# Altium PCB PS.PcbDoc
Units mm, origin at the board's own origin, x right, y up, seen from the top; angles counter-clockwise.
Board outline 55 x 64 mm, 2 copper layers (Top Layer, Bottom Layer), stack 1.571 mm thick; 25 components, 11 nets, 83 pads, 162 vias.
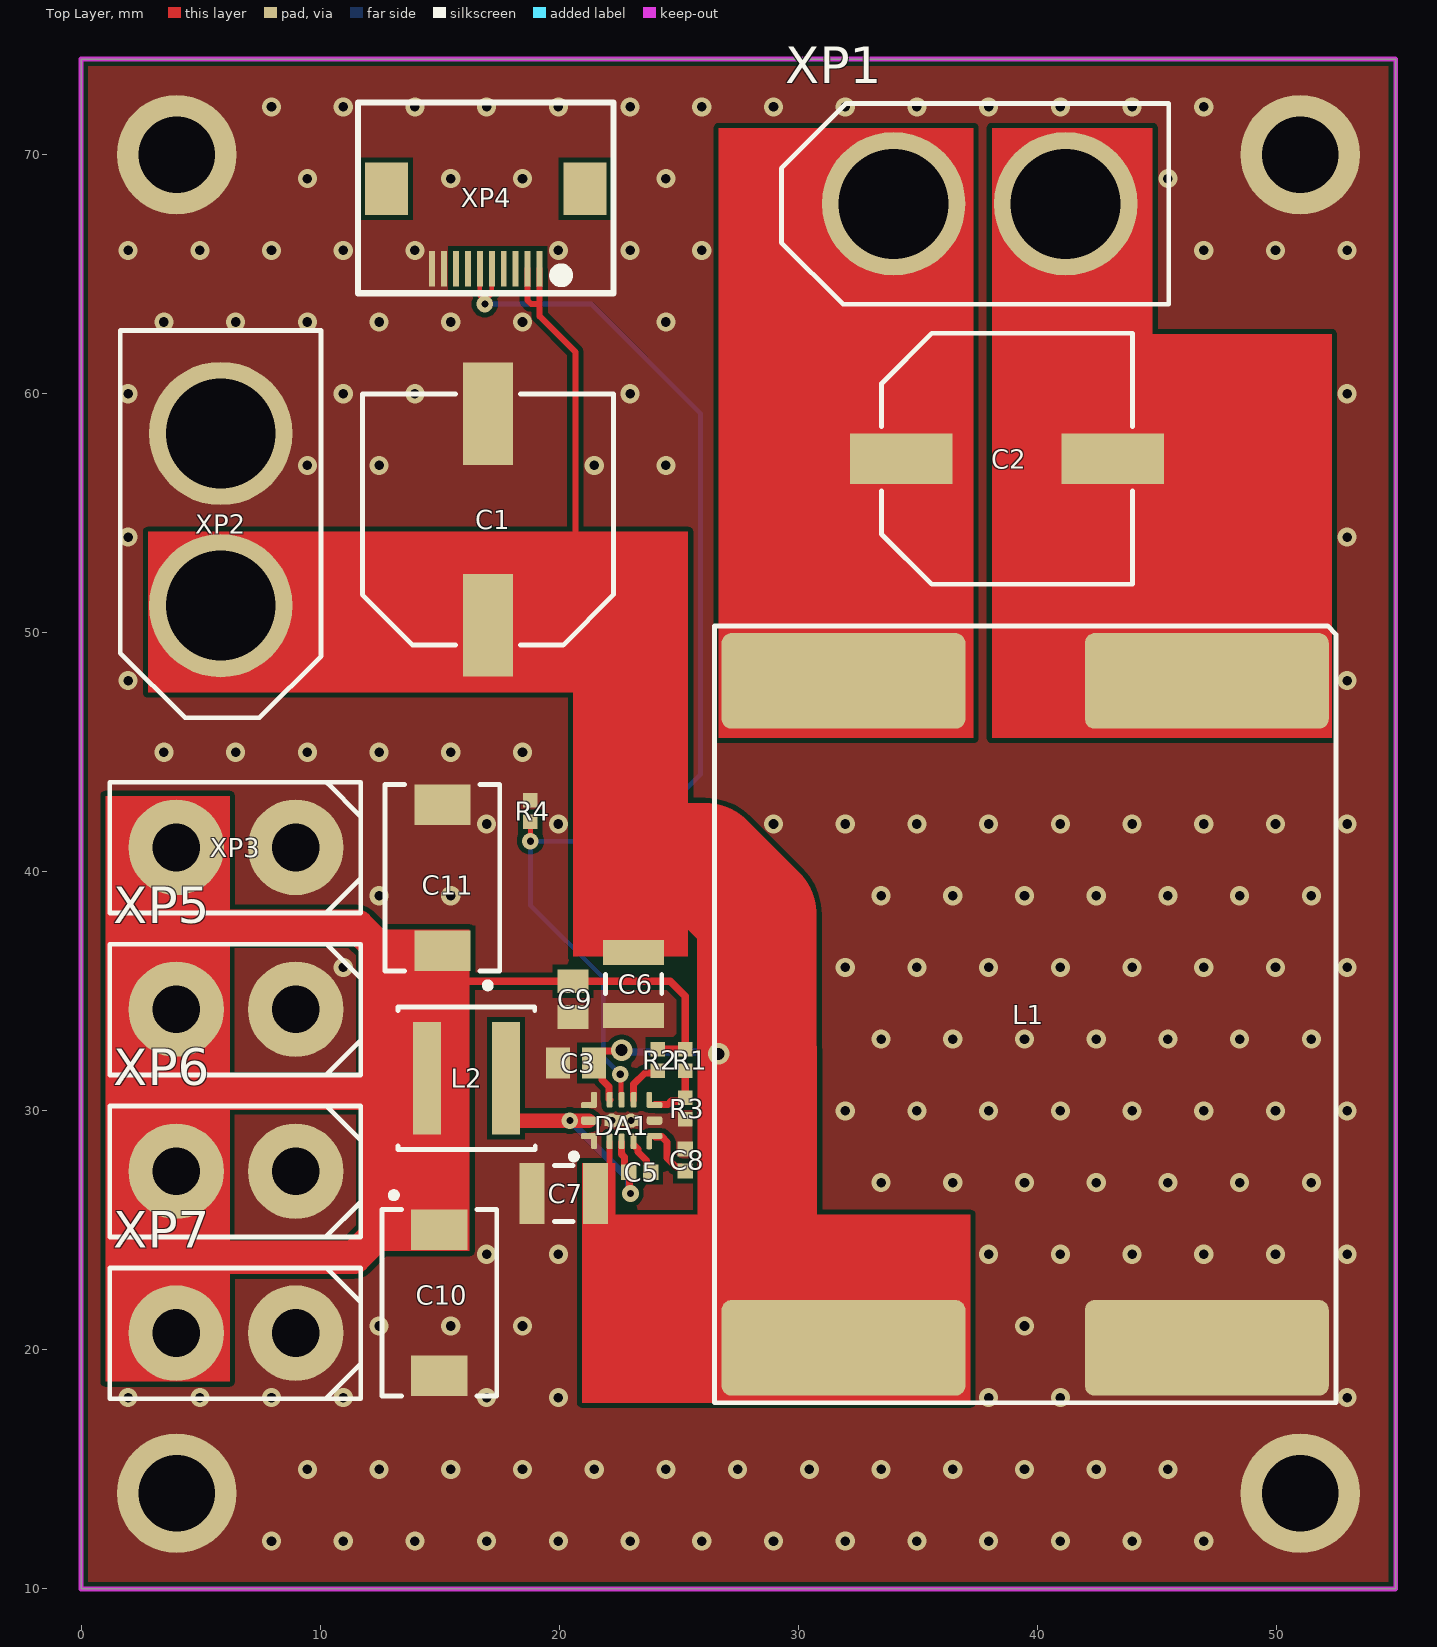
[diagram p0: Top Layer view]
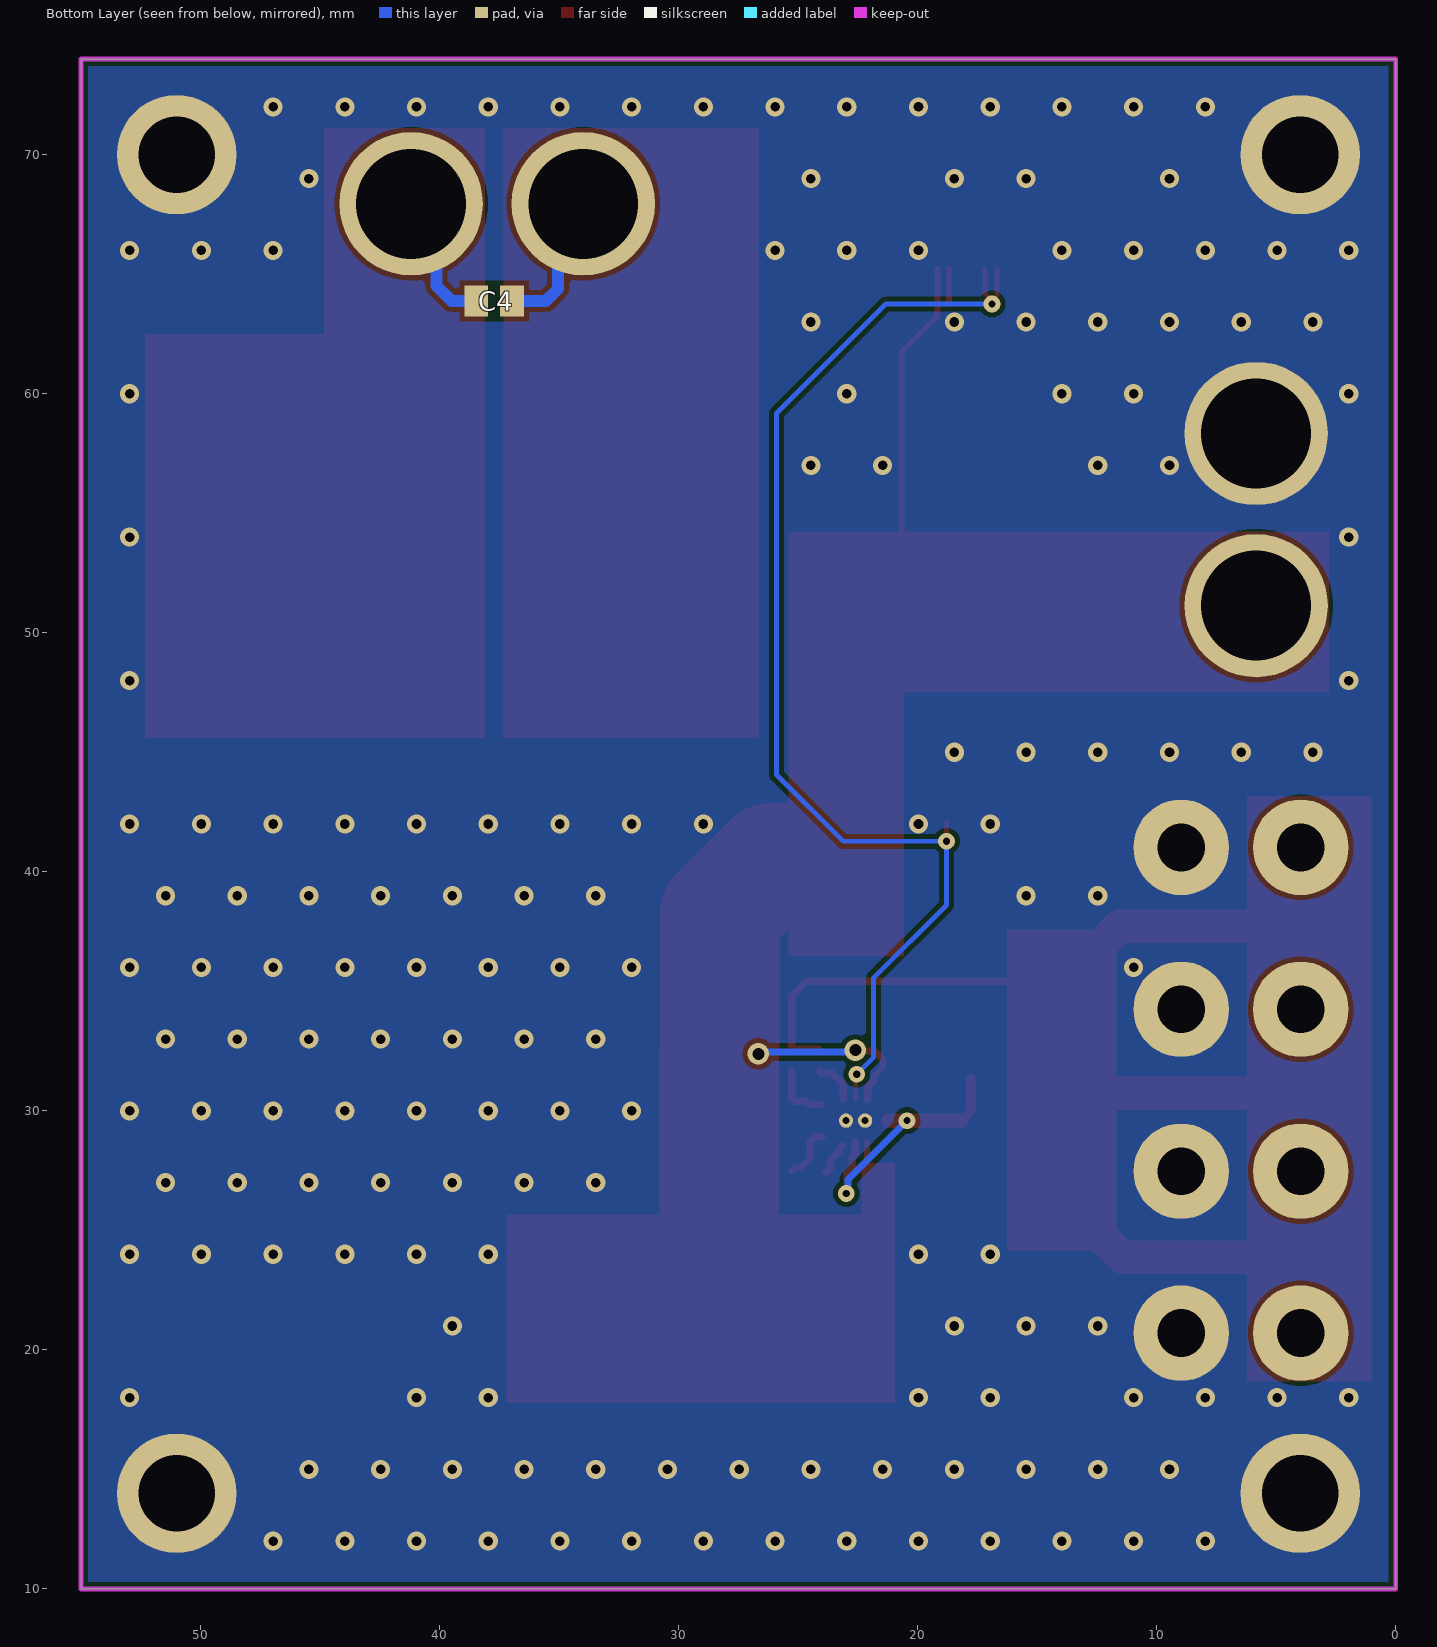
[diagram p1: Bottom Layer view, seen from below]
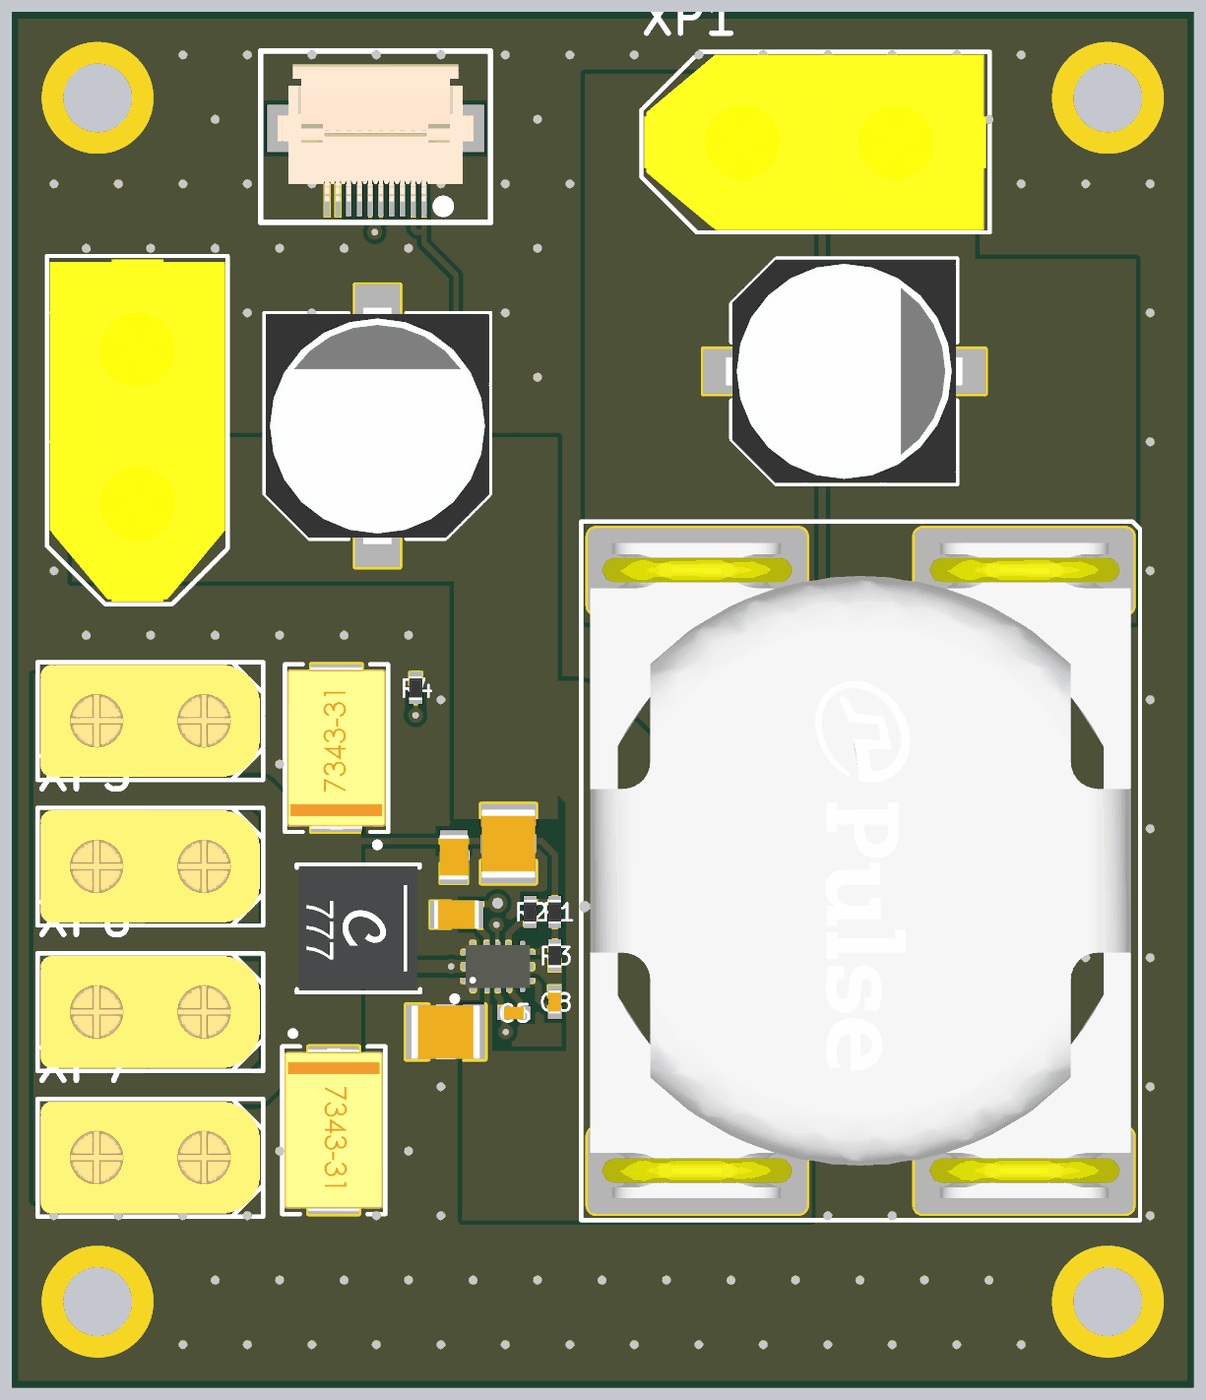
[diagram p2: 3D render of the assembled board from above, using the file's embedded part models]

## Layer stack, top to bottom
Top Solder: solder mask 0.0102, Solder Resist, Dk 3.5
Top Layer: signal copper 0.0356
Dielectric 1: dielectric 1.5, FR-4, Dk 4.8
Bottom Layer: signal copper 0.0356
Bottom Solder: solder mask 0.0102, Solder Resist, Dk 3.5

## Board outline
0,10 0,74 55,74 55,10

## Design rules (kind name [scope] priority, off if disabled: settings)
Clearance Clearance_1 [InNetClass('RF CLR')] p1: gap=0.254 ignorepadtopadclearanceinfootprint=FALSE except(1: Arc-Fill Arc-Poly Arc-Region Track-Fill Track-Poly Track-Region SMDPad-Fill SMDPad-Poly SMDPad-Region THPad-Fill THPad-Poly THPad-Region Via-Fill Via-Poly Via-Region Fill-Fill Fill-Poly Fill-Region Poly-Poly Poly-Region Region-Region)
Clearance [All] p2: gap=0.2 ignorepadtopadclearanceinfootprint=FALSE
HoleSize [All] p1: absolutevalues=TRUE maxlimit=5 minlimit=0.2 maxpercent=80.000 minpercent=20.000
PlaneConnect [All] p1: planeconnectstyle=Direct reliefexpansion=0.508 reliefentries=4 reliefconductorwidth=0.254 reliefairgap=0.254
PolygonConnect [All] p1: connectstyle=Direct reliefconductorwidth=0.254 reliefentries=4 polygonreliefangle="90 Angle" airgapwidth=0.254
RoutingVias [All] p1: holewidth=0.4 width=0.8 viastyle="Through Hole" minholewidth=0.3 minwidth=0.7 maxholewidth=4 maxwidth=5
SolderMaskExpansion [All] p1: expansion=0.102 istentingtop=FALSE
SupplyNets "Schematic Supply Nets_35" [InNet('PWR_ON')] p1: voltage=0.000
SupplyNets "Schematic Supply Nets_15" [InNet('VDD_28V')] p2: voltage=0.000
SupplyNets "Schematic Supply Nets_14" [InNet('GND')] p3: voltage=0.000
Width [All] p1: maxlimit=5 minlimit=0.2 preferedwidth=0.25
28 further rules are at their usual default settings.

## Components (designator, comment, footprint, x,y, rotation, side; value= is the part's Value field where it differs from the comment)
C1 "47мк" CAPAE116103X105N 17.018,54.737 r90 top
C2 "47мк" CAPAE116103X105N 38.735,57.277 r0 top
C3 "1000" CAPC2012X12L 20.701,32.004 r0 top
C4 "1000" CAPC2012X12L 37.719,63.881 r180 bottom
C5 "0.1мк" CAPC1005X06N 23.368,27.432 r0 top
C6 "10мк" CAPC3225X27L 23.114,35.306 r90 top
C7 "10мк" CAPC3225X27L 20.193,26.543 r0 top
C8 "1мк" CAPC1005X06N 25.273,27.94 r270 top
C9 "22мк" CAPC2012X12L 20.574,34.671 r90 top
C10 "47мк" CAPMP7343X28L 14.986,21.971 r90 top
C11 "47мк" CAPMP7343X28L 15.113,39.751 r270 top
DA1 "LM60440DRPKR" WQFN-13 22.614,29.591 r90 top
L1 "PA4339.701NLT" HCCI-80-2 39.497,34.036 r270 top
L2 "5.6мкГн" Coilcraft-XAL5030 16.125,31.369 r180 top
R1 "100к" RESC1005X06N 25.273,32.131 r270 top
R2 "100к" RESC1005X06N 24.13,32.131 r270 top
R3 "9.1к" RESC1005X06N 25.273,30.099 r270 top
R4 "100к" RESC1005X06N 18.796,42.545 r90 top
XP1 "XT60-F" XT60-F 37.592,67.945 r0 top
XP2 "XT60-F" XT60-F 5.842,54.737 r90 top
XP3 "XT30UPB-M" XT30UPB-M 6.477,41.021 r180 top
XP4 "FH12-10S-0.5SVA" FH12-10S-0.5SH 16.932,65.23 r180 top
XP5 "XT30UPB-M" XT30UPB-M 6.477,34.248 r180 top
XP6 "XT30UPB-M" XT30UPB-M 6.477,27.474 r180 top
XP7 "XT30UPB-M" XT30UPB-M 6.477,20.701 r180 top

## Footprints (in the part's own frame and the unit in brackets; to place one, negate y for a bottom-side part, rotate by r counter-clockwise, add the part's x,y. Pads: shape width x height; smd on the part's side, far side on the other; paste and mask are expansions set on the pad)
CAPAE116103X105N [mm] "Aluminum Electrolytic Capacitor, Body 10,30x10,30x10,50mm, IPC Medium Density"
  rect 4.3x2.1 smd: 1(-4.425,0) 2(4.425,0)
  silkscreen extent -5.25,-5.25 5.25,5.25, body extent -5.5,-5.2 5.5,5.2, height 10.41
CAPC1005X06N [mm] "Chip Capacitor, 2-Leads, Body 1,00x0,50mm, IPC Medium Density"
  rect 0.64x0.64 smd mask+0.05: 1(-0.46,0) 2(0.46,0)
  body extent -0.55,-0.3 0.55,0.3, height 0.6
CAPC2012X12L [mm] "Chip Capacitor, 2-Leads, Body 2,00x1,25mm, IPC High Density"
  rect 1x1.3 smd mask+0.05: 1(-0.75,0) 2(0.75,0)
  body extent -1.05,-0.67 1.05,0.67, height 1.25
CAPC3225X27L [mm] "Chip Capacitor, 2-Leads, Body 3,20x2,50mm, IPC High Density"
  rect 1.05x2.55 smd: 1(-1.325,0) 2(1.325,0)
  silkscreen extent -0.4,-1.17 0.4,1.18, body extent -1.6,-1.25 1.6,1.25, height 2.7
CAPMP7343X28L [mm] "Molded Capacitor, 2-Leads, Body 7.30x4.30mm, IPC High Density"
  rect 1.7x2.35 smd: 1(3.05,0) 2(-3.05,0)
  silkscreen extent -3.9,-2.4 4.62,2.4, body extent -3.8,-2.3 3.8,2.3, height 3.1
Coilcraft-XAL5030 [mm]
  rect 1.18x4.7 smd: 1(-1.655,0) 2(1.655,0)
  silkscreen extent -2.88,-2.97 2.86,2.99, body extent -2.74,-2.84 2.74,2.84, height 3.1
FH12-10S-0.5SH [mm] "FFC/FPC Connector 10 Circuits"
  rect 1.8x2.2 smd mask+0.051: 0(-4.15,-3.35) 0(4.15,-3.35)
  rect 0.25x1.5 smd mask+0.051: 1(-2.25,0) 2(-1.75,0) 3(-1.25,0) 4(-0.75,0) 5(-0.25,0) 6(0.25,0) 7(0.75,0) 8(1.25,0) 9(1.75,0) 10(2.25,0)
  silkscreen extent -5.35,-6.95 5.35,1.02, body extent -4.55,-6.35 4.55,0.05, height 2.14
HCCI-80-2 [mm] "SMT Common Mode Chokes 25.4x31 mm"
  rrect20% 4x10.2 smd: 1(-13.95,-7.6) 2(-13.95,7.6) 3(13.95,7.6) 4(13.95,-7.6)
  silkscreen extent -16.25,-13 16.25,13, body extent -15.25,-12.58 15.23,12.57, height 11.98
RESC1005X06N [mm] "Chip Resistor, 2-Leads, Body 1,00x0,50mm, IPC Medium Density"
  rect 0.6x0.6 smd mask+0.05: 1(-0.45,0) 2(0.45,0)
  body extent -0.55,-0.3 0.55,0.3, height 0.6
WQFN-13 [mm] "3.00 mm × 2.00 mm"
  rrect50% 0.65x0.25 smd mask+0.05: 1(-0.87,1.15) 2(-0.87,0.5) 3(-0.87,0) 4(-0.87,-0.5) 5(-0.875,-1.155) 7(0.87,-1.155) 8(0.87,-0.5) 9(0.87,0) 10(0.87,0.5) 11(0.875,1.155)
  rrect50% 0.25x0.65 smd mask+0.05: 1(-0.65,1.375) 5(-0.65,-1.375) 7(0.65,-1.38) 11(0.65,1.375)
  rrect50% 0.35x0.65 smd mask+0.05: 6(0,-1.375) 12(0,1.375)
  round 0.6 hole 0.3 mask+0.05: 13(0,0.414) 13(0,-0.386)
  rect 0.45x1.45 smd mask+0.05: 13(0,0)
  silkscreen extent -1.62,1.87 -1.38,2.12, body extent -1,-1.5 1,1.5, height 0.7
XT30UPB-M [mm]
  round 4 hole 2: 1(-2.5,0) 2(2.5,0)
  silkscreen extent -5.23,-2.73 5.28,2.75, body extent -5.07,-2.6 5.13,2.6, height 9.4
XT60-F [mm]
  round 6 hole 4.6: 1(-3.6,0) 2(3.6,0)
  silkscreen extent -8.29,-4.2 7.91,4.2, body extent -8.16,-4.09 7.74,4.06, height 17.1

## Part data
C1 C2: library part "Конденсатор гибридный SMD 47мкФ ±20% 80В", "Гибридный ЧИП-конденсатор", Manufacturer=Panasonic, ManufacturerPartNumber=EEHZC1K470V, Power/Voltage=80В, Tolerance=±20%, LatestRevisionDate=29-May-2009, LatestRevisionNote="IPC-7351 Footprint Added.", PackageDescription="ZC Series - Anti-Vibration", PackageReference="ZC Series", Published=8-Jun-2000, Publisher="Altium Limited"
C3 C4: library part "Кер.ЧИП конд. 0805 1000пФ X7R 10% 100В", "Кер. ЧИП-конденсатор", Manufacturer=WALSIN, ManufacturerPartNumber=0805B102K100, Power/Voltage=100В, Tolerance=±10%, TKE=X7R
C5: library part "Кер.ЧИП конд. 0402 0.1мкФ X7R 10%, 16В", "Кер. ЧИП-конденсатор", Power/Voltage=16В, Tolerance=±10%, PackageReference=0402, TKE=X7R
C6 C7: library part "Кер.ЧИП конд. 1210 10мкФ X5R 20% 50В", "Кер. ЧИП-конденсатор", Manufacturer=Murata, ManufacturerPartNumber=GRM32ER71H106, Power/Voltage=50В, Tolerance=±20%, TKE=X5R
C8: library part "Кер.ЧИП конд. 0402 1мкФ X5R 10%, 10В", "Кер. ЧИП-конденсатор", Power/Voltage=10В, Tolerance=±10%, PackageReference=0402, TKE=X5R
C9: library part "Кер.ЧИП конд. 0805 22мкФ X5R 10% 16В", "Кер. ЧИП-конденсатор", Manufacturer=TDK, ManufacturerPartNumber=C2012X5R1C226KT, Power/Voltage=16В, Tolerance=±10%, TKE=X5R
C10 C11: library part "Конденсатор танталовый SMD D case 47мкФ ±10% 25B", "Тант. ЧИП-конденсатор", Power/Voltage=25В, Tolerance=±10%, LatestRevisionDate=29-May-2009, LatestRevisionNote="IPC-7351 Footprint Added.", PackageDescription="Chip Capacitor", PackageReference="тип D", Published=8-Jun-2000, Publisher="Altium Limited"
DA1: library part "Микросхема LM60440DRPKR", "3.8-V to 36-V, 4-A Ultra-Small Synchronous Step-Down Converter", ComponentLink1Description=datasheet, ComponentLink1URL=https://www.ti.com/lit/ds/symlink/lm60440.pdf?HQS=dis-dk-null-digikeymode-dsf-pf-null-wwe&ts=1663282176250&ref_url=https%253A%252F%252Fwww.digikey.si%252F
L1: library part "ЧИП синфазный фильтр PG1265NL", "SMT Common Mode Choke", Manufacturer=Pulse, ComponentLink1Description=datasheet, ComponentLink1URL=https://products.pulseelex.com/files/product_files/P850.pdf, ManufacturerPartNumber=PA4339.701NLT
L2: library part "ЧИП индуктивность XAL5030-562MEB", "Shielded Power Inductor – XAL5030", Manufacturer=Сoilcraft, ManufacturerPartNumber=XAL5030-222MEB
R1 R2 R4: library part "Чип резистор 0402 100 кОм, 5%", "ЧИП-резистор", Tolerance=±5%, PackageReference=0402, TKE="100 ppm/°С"
R3: library part "Чип резистор 0402 9,1 кОм, 5%", "ЧИП-резистор", Tolerance=±5%, PackageReference=0402, TKE="100 ppm/°С"
XP1 XP2: library part "Соединитель XT60-F", "AMASS XT60-F"
XP3 XP5 XP6 XP7: library part "Соединитель XT30UPB-M", "AMASS XT30UPB-M  5 mm"
XP4: library part "Соединитель FH12-10S-0.5SVA", "0.5mm  Pitch FPC/FFC Connector FH12 Series", Manufacturer=Hirose

## Free pads (board coordinates)
  round 5 hole 3.2: 1(4,14) 1(4,70) 1(51,14) 1(51,70)

## Via types
v1: diameter 0.8, hole 0.4, Top Layer to Bottom Layer, tented both sides, 155 vias
v2: diameter 0.7, hole 0.3, Top Layer to Bottom Layer, tented both sides, 5 vias
v3: diameter 0.9, hole 0.5, Top Layer to Bottom Layer, tented both sides, 2 vias

## Nets (pads, with @x,y where several pads share a name; then routed paths per layer and width w, separated by ;. In a path a pad name is that pad's centre, name@x,y a point inside that pad or via, vN(x,y) a via of type N, cw(c..) or ccw(c..) an arc to the next point about the centre after c; other vN are vias at no path point)
GND: C1.2 C3.1 C6.1 C7.1 C8.1 C9.1 C10.2 C11.2 DA1.1 DA1.6 DA1.11 DA1.13 L1.3 pad.1 R3.2 R4.2 XP2.2 XP3.1 XP4.9 XP4.10 XP5.1 XP6.1 XP7.1
  other v1: 7.967,12 10.967,12 13.967,12 16.967,12 19.967,12 22.967,12 25.967,12 28.967,12 31.967,12 34.967,12 37.967,12 40.967,12 43.967,12 46.967,12 9.467,15 12.467,15 15.467,15 18.467,15 21.467,15 24.467,15 27.467,15 30.467,15 33.467,15 36.467,15 39.467,15 42.467,15 45.467,15 1.967,18 4.967,18 7.967,18 10.967,18 16.967,18 19.967,18 37.967,18 40.967,18 52.967,18 12.467,21 15.467,21 18.467,21 39.467,21 16.967,24 19.967,24 37.967,24 40.967,24 43.967,24 46.967,24 49.967,24 52.967,24 33.467,27 36.467,27 39.467,27 42.467,27 45.467,27 48.467,27 51.467,27 31.967,30 34.967,30 37.967,30 40.967,30 43.967,30 46.967,30 49.967,30 52.967,30 33.467,33 36.467,33 39.467,33 42.467,33 45.467,33 48.467,33 51.467,33 10.967,36 31.967,36 34.967,36 37.967,36 40.967,36 43.967,36 46.967,36 49.967,36 52.967,36 12.467,39 15.467,39 33.467,39 36.467,39 39.467,39 42.467,39 45.467,39 48.467,39 51.467,39 16.967,42 19.967,42 28.967,42 31.967,42 34.967,42 37.967,42 40.967,42 43.967,42 46.967,42 49.967,42 52.967,42 3.467,45 6.467,45 9.467,45 12.467,45 15.467,45 18.467,45 1.967,48 52.967,48 1.967,54 52.967,54 9.467,57 12.467,57 21.467,57 24.467,57 1.967,60 10.967,60 13.967,60 22.967,60 52.967,60 3.467,63 6.467,63 9.467,63 12.467,63 15.467,63 18.467,63 24.467,63 1.967,66 4.967,66 7.967,66 10.967,66 13.967,66 19.967,66 22.967,66 25.967,66 46.967,66 49.967,66 52.967,66 9.467,69 15.467,69 18.467,69 24.467,69 45.467,69 7.967,72 10.967,72 13.967,72 16.967,72 19.967,72 22.967,72 25.967,72 28.967,72 31.967,72 34.967,72 37.967,72 40.967,72 43.967,72 46.967,72
NetC2_1: C2.1 C4.2 L1.1 XP1.1 | length 6.1
  Bottom Layer w0.5: XP1.1 35.044,66.893 35.044,64.397 35.56,63.881 C4.2
NetC2_2: C2.2 C4.1 L1.2 XP1.2 | length 5.8
  Bottom Layer w0.5: C4.1 39.497,63.881 40.14,64.524 40.14,66.893 XP1.2
NetC5_1: C5.1 DA1.3 DA1.12 L2.1 | length 11.5
  Top Layer w0.2: DA1.3@22.606,28.729 DA1.3
  Top Layer w0.3: DA1.3 22.614,28.186 22.738,28.062 22.738,27.602 C5.1 22.948,27.393 22.948,26.582 v2(22.987,26.543)
  Top Layer w0.4: L2.1 17.78,29.981 L2.1@18.17,29.591
  Top Layer w0.6: L2.1@18.17,29.591 v2(20.447,29.591) DA1.12
  Bottom Layer w0.3: v2(20.447,29.591) 22.91,27.128 22.91,26.62 v2(22.987,26.543)
NetC5_2: C5.2 DA1.4 | length 1.4
  Top Layer w0.3: DA1.4@23.139,28.546 23.294,28.391 23.294,28.283 23.658,27.919 23.658,27.602 C5.2
NetC8_2: C8.2 DA1.5 | length 2.2
  Top Layer w0.3: DA1.5@24.014,28.916 24.297,28.916 24.511,28.702 24.511,28.027 24.888,27.65 25.103,27.65 C8.2
NetC9_2: C9.2 C10.1 C11.1 L2.2 R1.1 R2.1 XP3.2 XP5.2 XP6.2 XP7.2 | length 47.6
  Top Layer w0.3: 14.998,35.421 C9.2 24.65,35.421 25.273,34.798 R1.1 R2.1
  Top Layer w1: 3.81,37.973 4.191,37.592 4.318,37.719
  Top Layer w1.4: 3.81,30.734 13.716,30.734 ; 4.064,23.876 11.43,23.876 14.224,26.67 ; 4.318,37.719 11.557,37.719 14.732,34.544
NetDA1_7: DA1.7 R1.2 R3.1 | length 2.5
  Top Layer w0.3: DA1.7@24.019,30.266 24.551,30.266 24.684,30.399 25.123,30.399 R3.1 R1.2
NetDA1_8: DA1.8 R2.2 | length 1.9
  Top Layer w0.3: DA1.8 23.114,31.115 23.587,31.588 24.037,31.588 R2.2
PWR_ON: DA1.9 R4.1 XP4.5 XP4.6 | length 50.7
  Top Layer w0.2: XP4.6 16.682,64.098 16.891,63.889 v2(16.891,63.754) 16.891,63.889 17.182,64.18 XP4.5 ; v2(18.796,41.275) R4.1 ; v2(22.553,31.534) 22.589,31.497 22.589,30.486 DA1.9
  Bottom Layer w0.2: v2(16.891,63.754) 21.336,63.754 25.908,59.182 25.908,44.069 23.114,41.275 v2(18.796,41.275) 18.796,38.608 21.844,35.56 21.844,32.242 v2(22.553,31.534)
VDD_28V: C1.1 C3.2 C6.2 C7.2 DA1.2 DA1.10 L1.4 XP2.1 XP4.1 XP4.2 | length 45.2
  Top Layer w0.2: C7.2 22.112,26.543
  Top Layer w0.25: XP4.2 18.682,63.894 18.822,63.754 19.182,63.754 ; XP4.1 19.182,63.754 ; 20.674,54.002 20.674,61.749 19.182,63.241 19.182,63.754 ; 22.112,26.543 22.112,28.483 22.114,28.484 DA1.2
  Top Layer w0.3: C3.2@21.451,31.854 21.801,31.504 21.801,31.296 22.089,31.007 22.089,30.486 DA1.10 ; C3.2 21.451,32.154 21.801,32.504 22.579,32.504 v3(22.611,32.536)
  Top Layer w5: 23.876,40.386 26.109,40.386 28.273,38.222 28.273,32.512 28.293,32.492 28.293,24.297 29.349,23.241 30.099,23.241
  Bottom Layer w0.3: v3(22.611,32.536) 22.687,32.461 26.594,32.461 v3(26.67,32.385)
pads on no net: XP4.0 XP4.3 XP4.4 XP4.7 XP4.8

## Polygon pours and split planes (outlines as drawn)
GND on Top Layer "GND_L01_P000" (solid, pour order 0): 0,10.033 54.991,10.033 54.991,74.041 0,74.041 0,9.906
GND on Bottom Layer "GND_L02_P001" (solid, pour order 1): 0,10.033 54.991,10.033 54.991,74.041 0,74.041 0,9.906

## Keep-outs
Keep-Out Layer:
  the board outline again, w0.2

## Other copper
Top Layer:
  rectangle net NetC9_2: 11.684,24.13 16.256,37.592
  rectangle net NetC9_2: 1.016,18.669 6.223,43.18
  rectangle net VDD_28V: 20.955,25.4 22.352,27.813
  rectangle net VDD_28V: 20.574,36.449 25.4,54.229
  rectangle net VDD_28V: 2.794,47.498 24.257,54.229
  rectangle net VDD_28V: 20.955,17.78 37.211,25.654
  rectangle net NetC2_2: 43.815,45.593 52.324,62.502
  rectangle net NetC2_2: 38.1,45.593 44.831,71.12
  rectangle net NetC2_1: 26.67,45.593 37.338,71.12